# EAGLE board RTC-Module-Panel_v10 (EAGLE 7.7.0), part 1 of 7
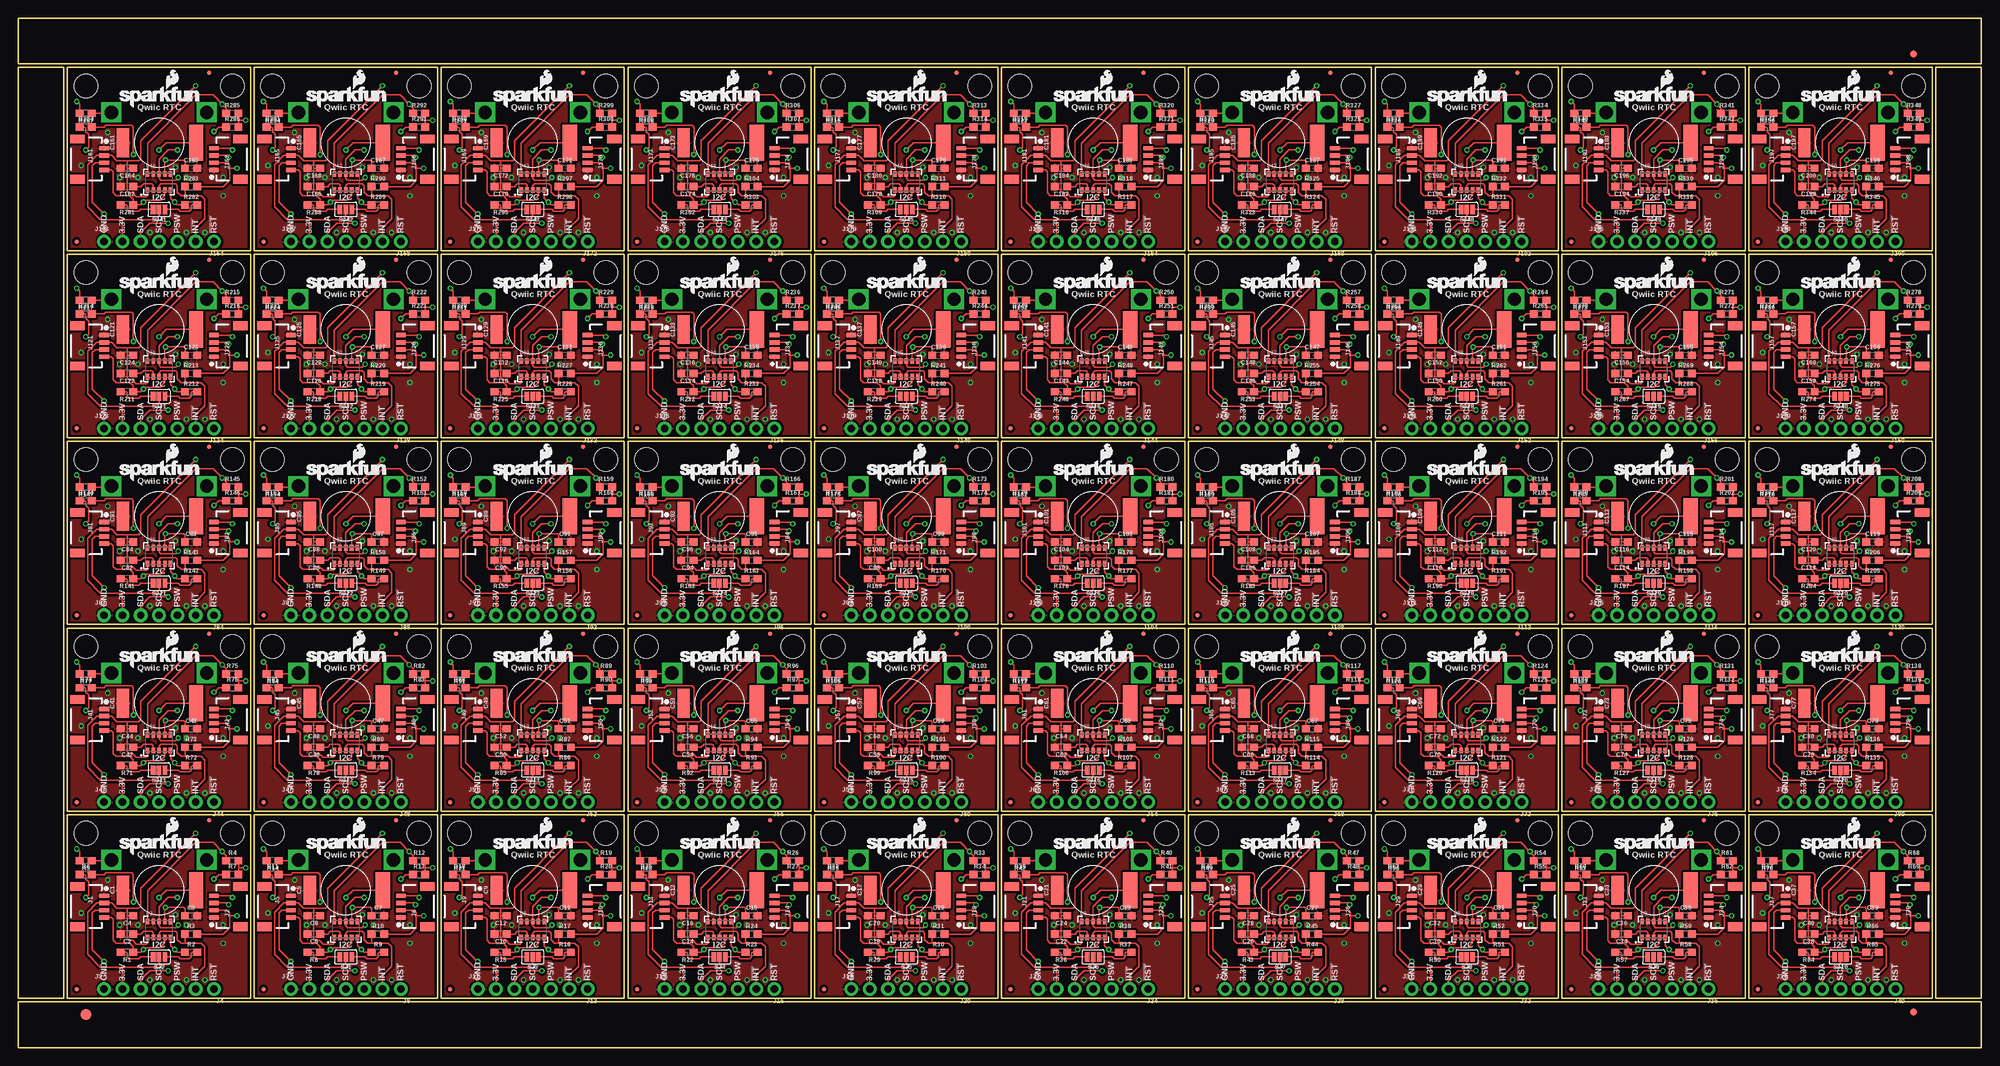
[diagram p0: board, top side]
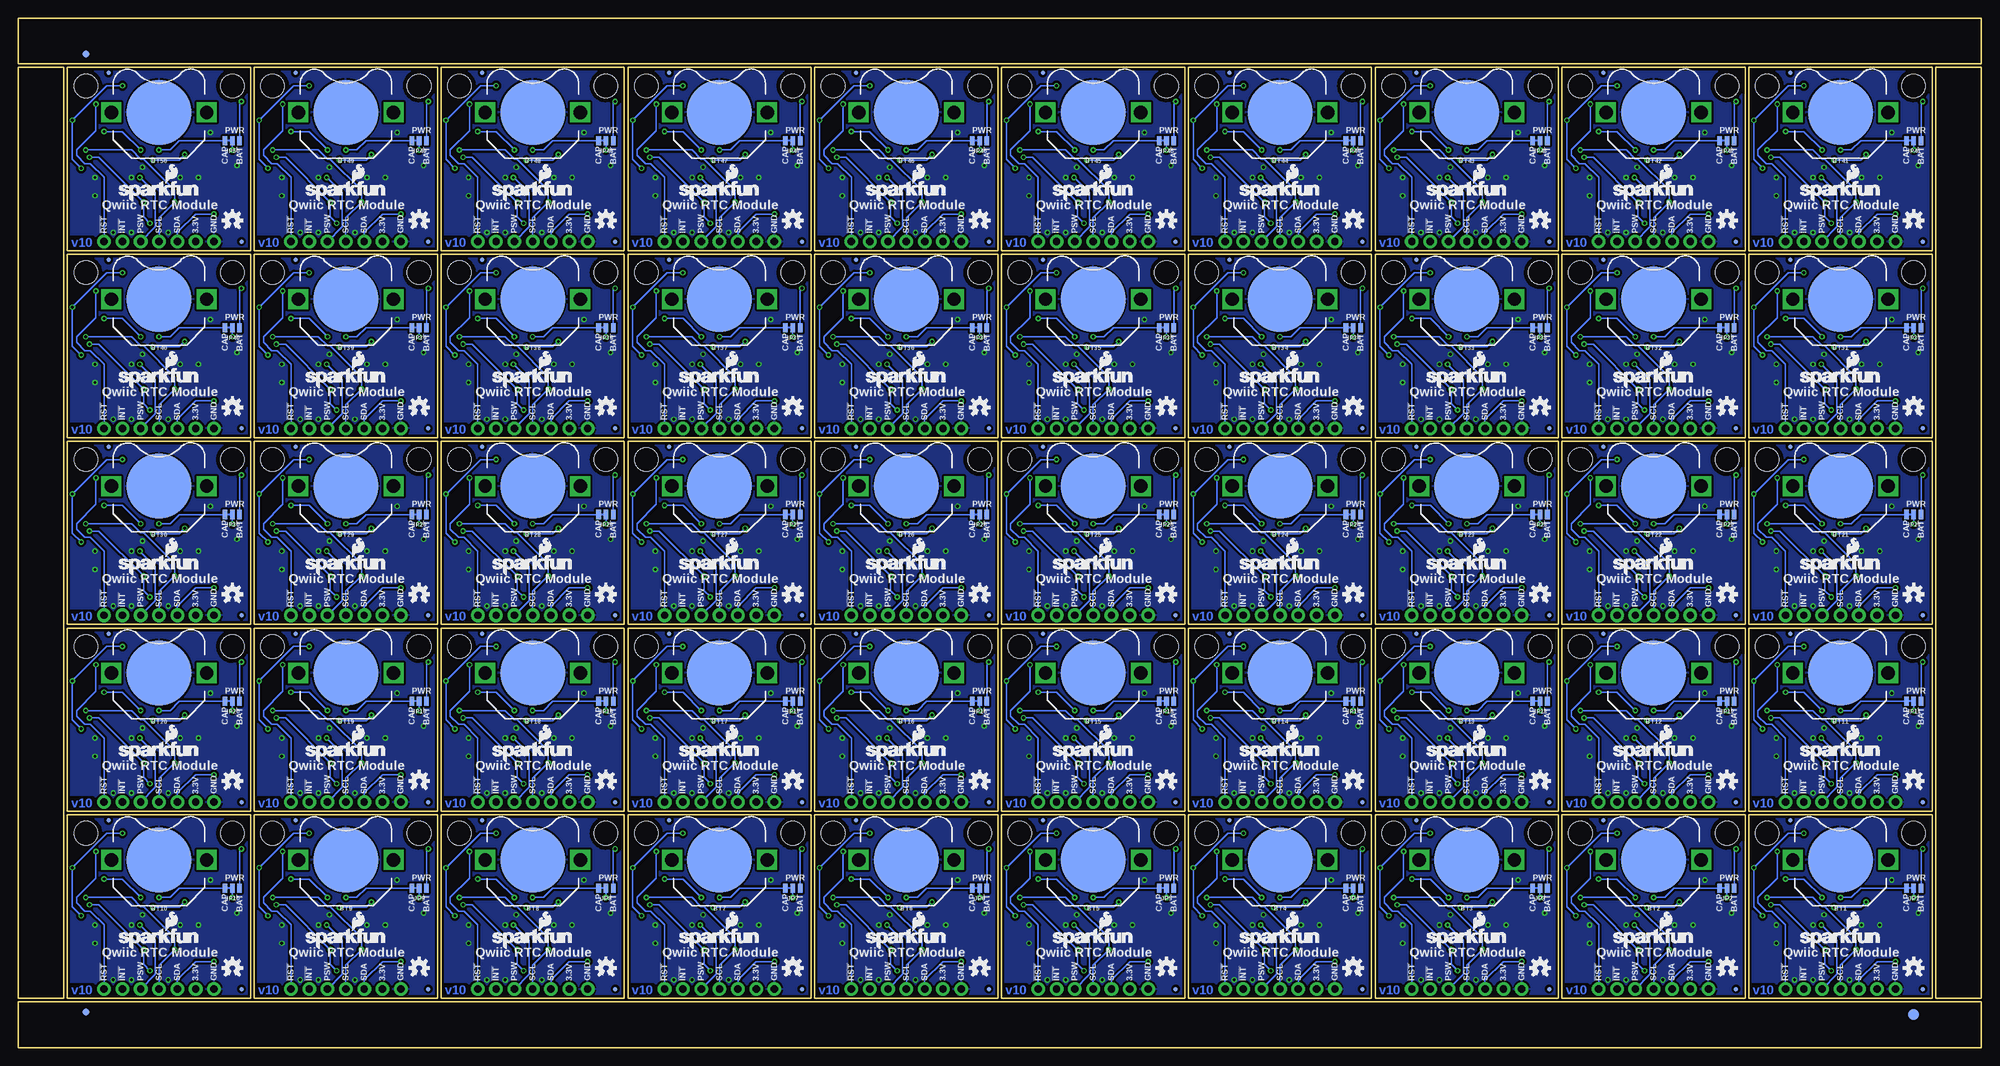
[diagram p1: board, bottom side, seen from below]

Size 272.29 x 142.75 mm. Coordinates in mm from the lower left corner, seen from the top.
Outline: 224 segments
Copper layers (1*16): Top 0.035mm / dielectric 1.5mm / Bottom 0.035mm
Design rules "SparkFun-2-layer-TIGHT": minimum track width 7mil, minimum drill 15mil, track to track 7mil, track to pad 7mil, pad to pad 7mil, via to via 7mil, smd to smd 7mil, copper to edge 7mil, drill to drill 7mil, minimum pad ring 7mil, minimum via ring 7mil, stop-mask expansion 4mil, vias tented up to drill 25mil, thermal gap 10mil

## Footprints (pad centres in the part's own frame; a part is rotated, then mirrored left to right if it is on the bottom)
BATTCON_12MM_PTH = smd 9 x 9: GND 0,0 | drill 1.854 square: VCC@1 6.604,0; VCC@2 -6.604,0
DSK-RADIAL-6.8MM = smd 5 x 2: + 0,5.15 | smd 4 x 1.7: - 0,-5
0603 = smd 1.1 x 1: 1 -0.85,0; 2 0.85,0
FIDUCIAL-1.5X3 = smd 1.5 x 1.5: 1 0,0
FIDUCIAL-1X2 = smd 1 x 1: 1 0,0
FIDUCIAL-MICRO = smd 0.635 x 0.635: 1 0,0
1X04_1MM_RA = smd 0.6 x 1.35: 1 -1.5,0; 2 -0.5,0; 3 0.5,0; 4 1.5,0 | smd 1.2 x 2: NC1 2.8,-3.675; NC2 -2.8,-3.675
1X04_NO_SILK = drill 1.016 pad 1.88: 1 0,0; 2 2.54,0; 3 5.08,0; 4 7.62,0
1X03_NO_SILK = drill 1.016 pad 1.88: 1 0,0; 2 2.54,0; 3 5.08,0
SMT-JUMPER_3_1-NC_TRACE_NO-SILK = smd 0.635 x 1.27: 1 -1.016,0; 2 0,0; 3 1.016,0
SMT-JUMPER_3_2-NC_PASTE_SILK = smd 0.635 x 1.27: 1 -0.813,0; 2 0,0; 3 0.813,0
RV-1805 = smd 0.5 x 0.8: 1 -1.6,-1.1; 2 -0.8,-1.1; 3 0,-1.1; 4 0.8,-1.1; 5 1.6,-1.1; 6 1.6,1.1; 7 0.8,1.1; 8 0,1.1; 9 -0.8,1.1; 10 -1.6,1.1 | smd 0 x 0: 11 0,0
STAND-OFF = hole 3.302: 0,0

## Placement (x,y rotation side)
BT1  [BATTCON_12MM_PTH]  19.56,26.04 0 bottom
BT2  [BATTCON_12MM_PTH]  45.47,26.04 0 bottom
BT3  [BATTCON_12MM_PTH]  71.37,26.04 0 bottom
BT4  [BATTCON_12MM_PTH]  97.28,26.04 0 bottom
BT5  [BATTCON_12MM_PTH]  123.19,26.04 0 bottom
BT6  [BATTCON_12MM_PTH]  149.1,26.04 0 bottom
BT7  [BATTCON_12MM_PTH]  175.01,26.04 0 bottom
BT8  [BATTCON_12MM_PTH]  200.91,26.04 0 bottom
BT9  [BATTCON_12MM_PTH]  226.82,26.04 0 bottom
BT10  [BATTCON_12MM_PTH]  252.73,26.04 0 bottom
BT11  [BATTCON_12MM_PTH]  19.56,51.94 0 bottom
BT12  [BATTCON_12MM_PTH]  45.47,51.94 0 bottom
BT13  [BATTCON_12MM_PTH]  71.37,51.94 0 bottom
BT14  [BATTCON_12MM_PTH]  97.28,51.94 0 bottom
BT15  [BATTCON_12MM_PTH]  123.19,51.94 0 bottom
BT16  [BATTCON_12MM_PTH]  149.1,51.94 0 bottom
BT17  [BATTCON_12MM_PTH]  175.01,51.94 0 bottom
BT18  [BATTCON_12MM_PTH]  200.91,51.94 0 bottom
BT19  [BATTCON_12MM_PTH]  226.82,51.94 0 bottom
BT20  [BATTCON_12MM_PTH]  252.73,51.94 0 bottom
BT21  [BATTCON_12MM_PTH]  19.56,77.85 0 bottom
BT22  [BATTCON_12MM_PTH]  45.47,77.85 0 bottom
BT23  [BATTCON_12MM_PTH]  71.37,77.85 0 bottom
BT24  [BATTCON_12MM_PTH]  97.28,77.85 0 bottom
BT25  [BATTCON_12MM_PTH]  123.19,77.85 0 bottom
BT26  [BATTCON_12MM_PTH]  149.1,77.85 0 bottom
BT27  [BATTCON_12MM_PTH]  175.01,77.85 0 bottom
BT28  [BATTCON_12MM_PTH]  200.91,77.85 0 bottom
BT29  [BATTCON_12MM_PTH]  226.82,77.85 0 bottom
BT30  [BATTCON_12MM_PTH]  252.73,77.85 0 bottom
BT31  [BATTCON_12MM_PTH]  19.56,103.76 0 bottom
BT32  [BATTCON_12MM_PTH]  45.47,103.76 0 bottom
BT33  [BATTCON_12MM_PTH]  71.37,103.76 0 bottom
BT34  [BATTCON_12MM_PTH]  97.28,103.76 0 bottom
BT35  [BATTCON_12MM_PTH]  123.19,103.76 0 bottom
BT36  [BATTCON_12MM_PTH]  149.1,103.76 0 bottom
BT37  [BATTCON_12MM_PTH]  175.01,103.76 0 bottom
BT38  [BATTCON_12MM_PTH]  200.91,103.76 0 bottom
BT39  [BATTCON_12MM_PTH]  226.82,103.76 0 bottom
BT40  [BATTCON_12MM_PTH]  252.73,103.76 0 bottom
BT41  [BATTCON_12MM_PTH]  19.56,129.67 0 bottom
BT42  [BATTCON_12MM_PTH]  45.47,129.67 0 bottom
BT43  [BATTCON_12MM_PTH]  71.37,129.67 0 bottom
BT44  [BATTCON_12MM_PTH]  97.28,129.67 0 bottom
BT45  [BATTCON_12MM_PTH]  123.19,129.67 0 bottom
BT46  [BATTCON_12MM_PTH]  149.1,129.67 0 bottom
BT47  [BATTCON_12MM_PTH]  175.01,129.67 0 bottom
BT48  [BATTCON_12MM_PTH]  200.91,129.67 0 bottom
BT49  [BATTCON_12MM_PTH]  226.82,129.67 0 bottom
BT50  [BATTCON_12MM_PTH]  252.73,129.67 0 bottom
C1  .22F-SUPERCAP  [DSK-RADIAL-6.8MM]  19.56,21.84 270 top
C2  47pF  [0603]  15.11,15.75 180 top
C3  10nF  [0603]  24,18.29 0 top
C4  10nF  [0603]  15.11,18.29 180 top
C5  .22F-SUPERCAP  [DSK-RADIAL-6.8MM]  45.47,21.84 270 top
C6  47pF  [0603]  41.02,15.75 180 top
C7  10nF  [0603]  49.91,18.29 0 top
C8  10nF  [0603]  41.02,18.29 180 top
C9  .22F-SUPERCAP  [DSK-RADIAL-6.8MM]  71.37,21.84 270 top
C10  47pF  [0603]  66.93,15.75 180 top
C11  10nF  [0603]  75.82,18.29 0 top
C12  10nF  [0603]  66.93,18.29 180 top
C13  .22F-SUPERCAP  [DSK-RADIAL-6.8MM]  97.28,21.84 270 top
C14  47pF  [0603]  92.84,15.75 180 top
C15  10nF  [0603]  101.73,18.29 0 top
C16  10nF  [0603]  92.84,18.29 180 top
C17  .22F-SUPERCAP  [DSK-RADIAL-6.8MM]  123.19,21.84 270 top
C18  47pF  [0603]  118.75,15.75 180 top
C19  10nF  [0603]  127.64,18.29 0 top
C20  10nF  [0603]  118.75,18.29 180 top
C21  .22F-SUPERCAP  [DSK-RADIAL-6.8MM]  149.1,21.84 270 top
C22  47pF  [0603]  144.65,15.75 180 top
C23  10nF  [0603]  153.54,18.29 0 top
C24  10nF  [0603]  144.65,18.29 180 top
C25  .22F-SUPERCAP  [DSK-RADIAL-6.8MM]  175.01,21.84 270 top
C26  47pF  [0603]  170.56,15.75 180 top
C27  10nF  [0603]  179.45,18.29 0 top
C28  10nF  [0603]  170.56,18.29 180 top
C29  .22F-SUPERCAP  [DSK-RADIAL-6.8MM]  200.91,21.84 270 top
C30  47pF  [0603]  196.47,15.75 180 top
C31  10nF  [0603]  205.36,18.29 0 top
C32  10nF  [0603]  196.47,18.29 180 top
C33  .22F-SUPERCAP  [DSK-RADIAL-6.8MM]  226.82,21.84 270 top
C34  47pF  [0603]  222.38,15.75 180 top
C35  10nF  [0603]  231.27,18.29 0 top
C36  10nF  [0603]  222.38,18.29 180 top
C37  .22F-SUPERCAP  [DSK-RADIAL-6.8MM]  252.73,21.84 270 top
C38  47pF  [0603]  248.28,15.75 180 top
C39  10nF  [0603]  257.18,18.29 0 top
C40  10nF  [0603]  248.28,18.29 180 top
C41  .22F-SUPERCAP  [DSK-RADIAL-6.8MM]  19.56,47.75 270 top
C42  47pF  [0603]  15.11,41.66 180 top
C43  10nF  [0603]  24,44.2 0 top
C44  10nF  [0603]  15.11,44.2 180 top
C45  .22F-SUPERCAP  [DSK-RADIAL-6.8MM]  45.47,47.75 270 top
C46  47pF  [0603]  41.02,41.66 180 top
C47  10nF  [0603]  49.91,44.2 0 top
C48  10nF  [0603]  41.02,44.2 180 top
C49  .22F-SUPERCAP  [DSK-RADIAL-6.8MM]  71.37,47.75 270 top
C50  47pF  [0603]  66.93,41.66 180 top
C51  10nF  [0603]  75.82,44.2 0 top
C52  10nF  [0603]  66.93,44.2 180 top
C53  .22F-SUPERCAP  [DSK-RADIAL-6.8MM]  97.28,47.75 270 top
C54  47pF  [0603]  92.84,41.66 180 top
C55  10nF  [0603]  101.73,44.2 0 top
C56  10nF  [0603]  92.84,44.2 180 top
C57  .22F-SUPERCAP  [DSK-RADIAL-6.8MM]  123.19,47.75 270 top
C58  47pF  [0603]  118.75,41.66 180 top
C59  10nF  [0603]  127.64,44.2 0 top
C60  10nF  [0603]  118.75,44.2 180 top
C61  .22F-SUPERCAP  [DSK-RADIAL-6.8MM]  149.1,47.75 270 top
C62  47pF  [0603]  144.65,41.66 180 top
C63  10nF  [0603]  153.54,44.2 0 top
C64  10nF  [0603]  144.65,44.2 180 top
C65  .22F-SUPERCAP  [DSK-RADIAL-6.8MM]  175.01,47.75 270 top
C66  47pF  [0603]  170.56,41.66 180 top
C67  10nF  [0603]  179.45,44.2 0 top
C68  10nF  [0603]  170.56,44.2 180 top
C69  .22F-SUPERCAP  [DSK-RADIAL-6.8MM]  200.91,47.75 270 top
C70  47pF  [0603]  196.47,41.66 180 top
C71  10nF  [0603]  205.36,44.2 0 top
C72  10nF  [0603]  196.47,44.2 180 top
C73  .22F-SUPERCAP  [DSK-RADIAL-6.8MM]  226.82,47.75 270 top
C74  47pF  [0603]  222.38,41.66 180 top
C75  10nF  [0603]  231.27,44.2 0 top
C76  10nF  [0603]  222.38,44.2 180 top
C77  .22F-SUPERCAP  [DSK-RADIAL-6.8MM]  252.73,47.75 270 top
C78  47pF  [0603]  248.28,41.66 180 top
C79  10nF  [0603]  257.18,44.2 0 top
C80  10nF  [0603]  248.28,44.2 180 top
C81  .22F-SUPERCAP  [DSK-RADIAL-6.8MM]  19.56,73.66 270 top
C82  47pF  [0603]  15.11,67.56 180 top
C83  10nF  [0603]  24,70.1 0 top
C84  10nF  [0603]  15.11,70.1 180 top
C85  .22F-SUPERCAP  [DSK-RADIAL-6.8MM]  45.47,73.66 270 top
C86  47pF  [0603]  41.02,67.56 180 top
C87  10nF  [0603]  49.91,70.1 0 top
C88  10nF  [0603]  41.02,70.1 180 top
C89  .22F-SUPERCAP  [DSK-RADIAL-6.8MM]  71.37,73.66 270 top
C90  47pF  [0603]  66.93,67.56 180 top
C91  10nF  [0603]  75.82,70.1 0 top
C92  10nF  [0603]  66.93,70.1 180 top
C93  .22F-SUPERCAP  [DSK-RADIAL-6.8MM]  97.28,73.66 270 top
C94  47pF  [0603]  92.84,67.56 180 top
C95  10nF  [0603]  101.73,70.1 0 top
C96  10nF  [0603]  92.84,70.1 180 top
C97  .22F-SUPERCAP  [DSK-RADIAL-6.8MM]  123.19,73.66 270 top
C98  47pF  [0603]  118.75,67.56 180 top
C99  10nF  [0603]  127.64,70.1 0 top
C100  10nF  [0603]  118.75,70.1 180 top
C101  .22F-SUPERCAP  [DSK-RADIAL-6.8MM]  149.1,73.66 270 top
C102  47pF  [0603]  144.65,67.56 180 top
C103  10nF  [0603]  153.54,70.1 0 top
C104  10nF  [0603]  144.65,70.1 180 top
C105  .22F-SUPERCAP  [DSK-RADIAL-6.8MM]  175.01,73.66 270 top
C106  47pF  [0603]  170.56,67.56 180 top
C107  10nF  [0603]  179.45,70.1 0 top
C108  10nF  [0603]  170.56,70.1 180 top
C109  .22F-SUPERCAP  [DSK-RADIAL-6.8MM]  200.91,73.66 270 top
C110  47pF  [0603]  196.47,67.56 180 top
C111  10nF  [0603]  205.36,70.1 0 top
C112  10nF  [0603]  196.47,70.1 180 top
C113  .22F-SUPERCAP  [DSK-RADIAL-6.8MM]  226.82,73.66 270 top
C114  47pF  [0603]  222.38,67.56 180 top
C115  10nF  [0603]  231.27,70.1 0 top
C116  10nF  [0603]  222.38,70.1 180 top
C117  .22F-SUPERCAP  [DSK-RADIAL-6.8MM]  252.73,73.66 270 top
C118  47pF  [0603]  248.28,67.56 180 top
C119  10nF  [0603]  257.18,70.1 0 top
C120  10nF  [0603]  248.28,70.1 180 top
C121  .22F-SUPERCAP  [DSK-RADIAL-6.8MM]  19.56,99.57 270 top
C122  47pF  [0603]  15.11,93.47 180 top
C123  10nF  [0603]  24,96.01 0 top
C124  10nF  [0603]  15.11,96.01 180 top
C125  .22F-SUPERCAP  [DSK-RADIAL-6.8MM]  45.47,99.57 270 top
C126  47pF  [0603]  41.02,93.47 180 top
C127  10nF  [0603]  49.91,96.01 0 top
C128  10nF  [0603]  41.02,96.01 180 top
C129  .22F-SUPERCAP  [DSK-RADIAL-6.8MM]  71.37,99.57 270 top
C130  47pF  [0603]  66.93,93.47 180 top
C131  10nF  [0603]  75.82,96.01 0 top
C132  10nF  [0603]  66.93,96.01 180 top
C133  .22F-SUPERCAP  [DSK-RADIAL-6.8MM]  97.28,99.57 270 top
C134  47pF  [0603]  92.84,93.47 180 top
C135  10nF  [0603]  101.73,96.01 0 top
C136  10nF  [0603]  92.84,96.01 180 top
C137  .22F-SUPERCAP  [DSK-RADIAL-6.8MM]  123.19,99.57 270 top
C138  47pF  [0603]  118.75,93.47 180 top
C139  10nF  [0603]  127.64,96.01 0 top
C140  10nF  [0603]  118.75,96.01 180 top
C141  .22F-SUPERCAP  [DSK-RADIAL-6.8MM]  149.1,99.57 270 top
C142  47pF  [0603]  144.65,93.47 180 top
C143  10nF  [0603]  153.54,96.01 0 top
C144  10nF  [0603]  144.65,96.01 180 top
C145  .22F-SUPERCAP  [DSK-RADIAL-6.8MM]  175.01,99.57 270 top
C146  47pF  [0603]  170.56,93.47 180 top
C147  10nF  [0603]  179.45,96.01 0 top
C148  10nF  [0603]  170.56,96.01 180 top
C149  .22F-SUPERCAP  [DSK-RADIAL-6.8MM]  200.91,99.57 270 top
C150  47pF  [0603]  196.47,93.47 180 top
C151  10nF  [0603]  205.36,96.01 0 top
C152  10nF  [0603]  196.47,96.01 180 top
C153  .22F-SUPERCAP  [DSK-RADIAL-6.8MM]  226.82,99.57 270 top
C154  47pF  [0603]  222.38,93.47 180 top
C155  10nF  [0603]  231.27,96.01 0 top
C156  10nF  [0603]  222.38,96.01 180 top
C157  .22F-SUPERCAP  [DSK-RADIAL-6.8MM]  252.73,99.57 270 top
C158  47pF  [0603]  248.28,93.47 180 top
C159  10nF  [0603]  257.18,96.01 0 top
C160  10nF  [0603]  248.28,96.01 180 top
C161  .22F-SUPERCAP  [DSK-RADIAL-6.8MM]  19.56,125.48 270 top
C162  47pF  [0603]  15.11,119.38 180 top
C163  10nF  [0603]  24,121.92 0 top
C164  10nF  [0603]  15.11,121.92 180 top
C165  .22F-SUPERCAP  [DSK-RADIAL-6.8MM]  45.47,125.48 270 top
C166  47pF  [0603]  41.02,119.38 180 top
C167  10nF  [0603]  49.91,121.92 0 top
C168  10nF  [0603]  41.02,121.92 180 top
C169  .22F-SUPERCAP  [DSK-RADIAL-6.8MM]  71.37,125.48 270 top
C170  47pF  [0603]  66.93,119.38 180 top
C171  10nF  [0603]  75.82,121.92 0 top
C172  10nF  [0603]  66.93,121.92 180 top
C173  .22F-SUPERCAP  [DSK-RADIAL-6.8MM]  97.28,125.48 270 top
C174  47pF  [0603]  92.84,119.38 180 top
C175  10nF  [0603]  101.73,121.92 0 top
C176  10nF  [0603]  92.84,121.92 180 top
C177  .22F-SUPERCAP  [DSK-RADIAL-6.8MM]  123.19,125.48 270 top
C178  47pF  [0603]  118.75,119.38 180 top
C179  10nF  [0603]  127.64,121.92 0 top
C180  10nF  [0603]  118.75,121.92 180 top
C181  .22F-SUPERCAP  [DSK-RADIAL-6.8MM]  149.1,125.48 270 top
C182  47pF  [0603]  144.65,119.38 180 top
C183  10nF  [0603]  153.54,121.92 0 top
C184  10nF  [0603]  144.65,121.92 180 top
C185  .22F-SUPERCAP  [DSK-RADIAL-6.8MM]  175.01,125.48 270 top
C186  47pF  [0603]  170.56,119.38 180 top
C187  10nF  [0603]  179.45,121.92 0 top
C188  10nF  [0603]  170.56,121.92 180 top
C189  .22F-SUPERCAP  [DSK-RADIAL-6.8MM]  200.91,125.48 270 top
C190  47pF  [0603]  196.47,119.38 180 top
C191  10nF  [0603]  205.36,121.92 0 top
C192  10nF  [0603]  196.47,121.92 180 top
C193  .22F-SUPERCAP  [DSK-RADIAL-6.8MM]  226.82,125.48 270 top
C194  47pF  [0603]  222.38,119.38 180 top
C195  10nF  [0603]  231.27,121.92 0 top
C196  10nF  [0603]  222.38,121.92 180 top
C197  .22F-SUPERCAP  [DSK-RADIAL-6.8MM]  252.73,125.48 270 top
C198  47pF  [0603]  248.28,119.38 180 top
C199  10nF  [0603]  257.18,121.92 0 top
C200  10nF  [0603]  248.28,121.92 180 top
E$1  [FIDUCIAL-1.5X3]  9.4,4.57 0 top
E$2  [FIDUCIAL-1.5X3]  9.4,4.57 0 bottom
E$3  [FIDUCIAL-1X2]  262.89,4.95 90 bottom
E$4  [FIDUCIAL-1X2]  262.89,137.79 90 bottom
E$6  [FIDUCIAL-1X2]  262.89,4.95 90 top
E$7  [FIDUCIAL-1X2]  262.89,137.79 90 top
FD1  FIDUCIALUFIDUCIAL  [FIDUCIAL-MICRO]  26.54,31.5 0 bottom
FD2  FIDUCIALUFIDUCIAL  [FIDUCIAL-MICRO]  26.54,31.5 0 top
FD3  FIDUCIALUFIDUCIAL  [FIDUCIAL-MICRO]  8.13,8.13 0 bottom
FD4  FIDUCIALUFIDUCIAL  [FIDUCIAL-MICRO]  8.13,8.13 0 top
FD5  FIDUCIALUFIDUCIAL  [FIDUCIAL-MICRO]  52.45,31.5 0 bottom
FD6  FIDUCIALUFIDUCIAL  [FIDUCIAL-MICRO]  52.45,31.5 0 top
FD7  FIDUCIALUFIDUCIAL  [FIDUCIAL-MICRO]  34.04,8.13 0 bottom
FD8  FIDUCIALUFIDUCIAL  [FIDUCIAL-MICRO]  34.04,8.13 0 top
FD9  FIDUCIALUFIDUCIAL  [FIDUCIAL-MICRO]  78.36,31.5 0 bottom
FD10  FIDUCIALUFIDUCIAL  [FIDUCIAL-MICRO]  78.36,31.5 0 top
FD11  FIDUCIALUFIDUCIAL  [FIDUCIAL-MICRO]  59.94,8.13 0 bottom
FD12  FIDUCIALUFIDUCIAL  [FIDUCIAL-MICRO]  59.94,8.13 0 top
FD13  FIDUCIALUFIDUCIAL  [FIDUCIAL-MICRO]  104.27,31.5 0 bottom
FD14  FIDUCIALUFIDUCIAL  [FIDUCIAL-MICRO]  104.27,31.5 0 top
FD15  FIDUCIALUFIDUCIAL  [FIDUCIAL-MICRO]  85.85,8.13 0 bottom
FD16  FIDUCIALUFIDUCIAL  [FIDUCIAL-MICRO]  85.85,8.13 0 top
FD17  FIDUCIALUFIDUCIAL  [FIDUCIAL-MICRO]  130.18,31.5 0 bottom
FD18  FIDUCIALUFIDUCIAL  [FIDUCIAL-MICRO]  130.18,31.5 0 top
FD19  FIDUCIALUFIDUCIAL  [FIDUCIAL-MICRO]  111.76,8.13 0 bottom
FD20  FIDUCIALUFIDUCIAL  [FIDUCIAL-MICRO]  111.76,8.13 0 top
FD21  FIDUCIALUFIDUCIAL  [FIDUCIAL-MICRO]  156.08,31.5 0 bottom
FD22  FIDUCIALUFIDUCIAL  [FIDUCIAL-MICRO]  156.08,31.5 0 top
FD23  FIDUCIALUFIDUCIAL  [FIDUCIAL-MICRO]  137.67,8.13 0 bottom
FD24  FIDUCIALUFIDUCIAL  [FIDUCIAL-MICRO]  137.67,8.13 0 top
FD25  FIDUCIALUFIDUCIAL  [FIDUCIAL-MICRO]  181.99,31.5 0 bottom
FD26  FIDUCIALUFIDUCIAL  [FIDUCIAL-MICRO]  181.99,31.5 0 top
FD27  FIDUCIALUFIDUCIAL  [FIDUCIAL-MICRO]  163.58,8.13 0 bottom
FD28  FIDUCIALUFIDUCIAL  [FIDUCIAL-MICRO]  163.58,8.13 0 top
FD29  FIDUCIALUFIDUCIAL  [FIDUCIAL-MICRO]  207.9,31.5 0 bottom
FD30  FIDUCIALUFIDUCIAL  [FIDUCIAL-MICRO]  207.9,31.5 0 top
FD31  FIDUCIALUFIDUCIAL  [FIDUCIAL-MICRO]  189.48,8.13 0 bottom
FD32  FIDUCIALUFIDUCIAL  [FIDUCIAL-MICRO]  189.48,8.13 0 top
FD33  FIDUCIALUFIDUCIAL  [FIDUCIAL-MICRO]  233.81,31.5 0 bottom
FD34  FIDUCIALUFIDUCIAL  [FIDUCIAL-MICRO]  233.81,31.5 0 top
FD35  FIDUCIALUFIDUCIAL  [FIDUCIAL-MICRO]  215.39,8.13 0 bottom
FD36  FIDUCIALUFIDUCIAL  [FIDUCIAL-MICRO]  215.39,8.13 0 top
FD37  FIDUCIALUFIDUCIAL  [FIDUCIAL-MICRO]  259.71,31.5 0 bottom
FD38  FIDUCIALUFIDUCIAL  [FIDUCIAL-MICRO]  259.71,31.5 0 top
FD39  FIDUCIALUFIDUCIAL  [FIDUCIAL-MICRO]  241.3,8.13 0 bottom
FD40  FIDUCIALUFIDUCIAL  [FIDUCIAL-MICRO]  241.3,8.13 0 top
FD41  FIDUCIALUFIDUCIAL  [FIDUCIAL-MICRO]  26.54,57.4 0 bottom
FD42  FIDUCIALUFIDUCIAL  [FIDUCIAL-MICRO]  26.54,57.4 0 top
FD43  FIDUCIALUFIDUCIAL  [FIDUCIAL-MICRO]  8.13,34.04 0 bottom
FD44  FIDUCIALUFIDUCIAL  [FIDUCIAL-MICRO]  8.13,34.04 0 top
FD45  FIDUCIALUFIDUCIAL  [FIDUCIAL-MICRO]  52.45,57.4 0 bottom
FD46  FIDUCIALUFIDUCIAL  [FIDUCIAL-MICRO]  52.45,57.4 0 top
FD47  FIDUCIALUFIDUCIAL  [FIDUCIAL-MICRO]  34.04,34.04 0 bottom
FD48  FIDUCIALUFIDUCIAL  [FIDUCIAL-MICRO]  34.04,34.04 0 top
FD49  FIDUCIALUFIDUCIAL  [FIDUCIAL-MICRO]  78.36,57.4 0 bottom
FD50  FIDUCIALUFIDUCIAL  [FIDUCIAL-MICRO]  78.36,57.4 0 top
FD51  FIDUCIALUFIDUCIAL  [FIDUCIAL-MICRO]  59.94,34.04 0 bottom
FD52  FIDUCIALUFIDUCIAL  [FIDUCIAL-MICRO]  59.94,34.04 0 top
FD53  FIDUCIALUFIDUCIAL  [FIDUCIAL-MICRO]  104.27,57.4 0 bottom
FD54  FIDUCIALUFIDUCIAL  [FIDUCIAL-MICRO]  104.27,57.4 0 top
FD55  FIDUCIALUFIDUCIAL  [FIDUCIAL-MICRO]  85.85,34.04 0 bottom
FD56  FIDUCIALUFIDUCIAL  [FIDUCIAL-MICRO]  85.85,34.04 0 top
FD57  FIDUCIALUFIDUCIAL  [FIDUCIAL-MICRO]  130.18,57.4 0 bottom
FD58  FIDUCIALUFIDUCIAL  [FIDUCIAL-MICRO]  130.18,57.4 0 top
FD59  FIDUCIALUFIDUCIAL  [FIDUCIAL-MICRO]  111.76,34.04 0 bottom
FD60  FIDUCIALUFIDUCIAL  [FIDUCIAL-MICRO]  111.76,34.04 0 top
FD61  FIDUCIALUFIDUCIAL  [FIDUCIAL-MICRO]  156.08,57.4 0 bottom
FD62  FIDUCIALUFIDUCIAL  [FIDUCIAL-MICRO]  156.08,57.4 0 top
FD63  FIDUCIALUFIDUCIAL  [FIDUCIAL-MICRO]  137.67,34.04 0 bottom
FD64  FIDUCIALUFIDUCIAL  [FIDUCIAL-MICRO]  137.67,34.04 0 top
FD65  FIDUCIALUFIDUCIAL  [FIDUCIAL-MICRO]  181.99,57.4 0 bottom
FD66  FIDUCIALUFIDUCIAL  [FIDUCIAL-MICRO]  181.99,57.4 0 top
FD67  FIDUCIALUFIDUCIAL  [FIDUCIAL-MICRO]  163.58,34.04 0 bottom
FD68  FIDUCIALUFIDUCIAL  [FIDUCIAL-MICRO]  163.58,34.04 0 top
FD69  FIDUCIALUFIDUCIAL  [FIDUCIAL-MICRO]  207.9,57.4 0 bottom
FD70  FIDUCIALUFIDUCIAL  [FIDUCIAL-MICRO]  207.9,57.4 0 top
FD71  FIDUCIALUFIDUCIAL  [FIDUCIAL-MICRO]  189.48,34.04 0 bottom
FD72  FIDUCIALUFIDUCIAL  [FIDUCIAL-MICRO]  189.48,34.04 0 top
FD73  FIDUCIALUFIDUCIAL  [FIDUCIAL-MICRO]  233.81,57.4 0 bottom
FD74  FIDUCIALUFIDUCIAL  [FIDUCIAL-MICRO]  233.81,57.4 0 top
FD75  FIDUCIALUFIDUCIAL  [FIDUCIAL-MICRO]  215.39,34.04 0 bottom
FD76  FIDUCIALUFIDUCIAL  [FIDUCIAL-MICRO]  215.39,34.04 0 top
FD77  FIDUCIALUFIDUCIAL  [FIDUCIAL-MICRO]  259.71,57.4 0 bottom
FD78  FIDUCIALUFIDUCIAL  [FIDUCIAL-MICRO]  259.71,57.4 0 top
FD79  FIDUCIALUFIDUCIAL  [FIDUCIAL-MICRO]  241.3,34.04 0 bottom
FD80  FIDUCIALUFIDUCIAL  [FIDUCIAL-MICRO]  241.3,34.04 0 top
FD81  FIDUCIALUFIDUCIAL  [FIDUCIAL-MICRO]  26.54,83.31 0 bottom
FD82  FIDUCIALUFIDUCIAL  [FIDUCIAL-MICRO]  26.54,83.31 0 top
FD83  FIDUCIALUFIDUCIAL  [FIDUCIAL-MICRO]  8.13,59.94 0 bottom
FD84  FIDUCIALUFIDUCIAL  [FIDUCIAL-MICRO]  8.13,59.94 0 top
FD85  FIDUCIALUFIDUCIAL  [FIDUCIAL-MICRO]  52.45,83.31 0 bottom
FD86  FIDUCIALUFIDUCIAL  [FIDUCIAL-MICRO]  52.45,83.31 0 top
FD87  FIDUCIALUFIDUCIAL  [FIDUCIAL-MICRO]  34.04,59.94 0 bottom
FD88  FIDUCIALUFIDUCIAL  [FIDUCIAL-MICRO]  34.04,59.94 0 top
FD89  FIDUCIALUFIDUCIAL  [FIDUCIAL-MICRO]  78.36,83.31 0 bottom
FD90  FIDUCIALUFIDUCIAL  [FIDUCIAL-MICRO]  78.36,83.31 0 top
FD91  FIDUCIALUFIDUCIAL  [FIDUCIAL-MICRO]  59.94,59.94 0 bottom
FD92  FIDUCIALUFIDUCIAL  [FIDUCIAL-MICRO]  59.94,59.94 0 top
FD93  FIDUCIALUFIDUCIAL  [FIDUCIAL-MICRO]  104.27,83.31 0 bottom
FD94  FIDUCIALUFIDUCIAL  [FIDUCIAL-MICRO]  104.27,83.31 0 top
FD95  FIDUCIALUFIDUCIAL  [FIDUCIAL-MICRO]  85.85,59.94 0 bottom
FD96  FIDUCIALUFIDUCIAL  [FIDUCIAL-MICRO]  85.85,59.94 0 top
FD97  FIDUCIALUFIDUCIAL  [FIDUCIAL-MICRO]  130.18,83.31 0 bottom
FD98  FIDUCIALUFIDUCIAL  [FIDUCIAL-MICRO]  130.18,83.31 0 top
FD99  FIDUCIALUFIDUCIAL  [FIDUCIAL-MICRO]  111.76,59.94 0 bottom
FD100  FIDUCIALUFIDUCIAL  [FIDUCIAL-MICRO]  111.76,59.94 0 top
FD101  FIDUCIALUFIDUCIAL  [FIDUCIAL-MICRO]  156.08,83.31 0 bottom
FD102  FIDUCIALUFIDUCIAL  [FIDUCIAL-MICRO]  156.08,83.31 0 top
FD103  FIDUCIALUFIDUCIAL  [FIDUCIAL-MICRO]  137.67,59.94 0 bottom
FD104  FIDUCIALUFIDUCIAL  [FIDUCIAL-MICRO]  137.67,59.94 0 top
FD105  FIDUCIALUFIDUCIAL  [FIDUCIAL-MICRO]  181.99,83.31 0 bottom
FD106  FIDUCIALUFIDUCIAL  [FIDUCIAL-MICRO]  181.99,83.31 0 top
FD107  FIDUCIALUFIDUCIAL  [FIDUCIAL-MICRO]  163.58,59.94 0 bottom
FD108  FIDUCIALUFIDUCIAL  [FIDUCIAL-MICRO]  163.58,59.94 0 top
FD109  FIDUCIALUFIDUCIAL  [FIDUCIAL-MICRO]  207.9,83.31 0 bottom
FD110  FIDUCIALUFIDUCIAL  [FIDUCIAL-MICRO]  207.9,83.31 0 top
FD111  FIDUCIALUFIDUCIAL  [FIDUCIAL-MICRO]  189.48,59.94 0 bottom
FD112  FIDUCIALUFIDUCIAL  [FIDUCIAL-MICRO]  189.48,59.94 0 top
FD113  FIDUCIALUFIDUCIAL  [FIDUCIAL-MICRO]  233.81,83.31 0 bottom
FD114  FIDUCIALUFIDUCIAL  [FIDUCIAL-MICRO]  233.81,83.31 0 top
FD115  FIDUCIALUFIDUCIAL  [FIDUCIAL-MICRO]  215.39,59.94 0 bottom
FD116  FIDUCIALUFIDUCIAL  [FIDUCIAL-MICRO]  215.39,59.94 0 top
FD117  FIDUCIALUFIDUCIAL  [FIDUCIAL-MICRO]  259.71,83.31 0 bottom
FD118  FIDUCIALUFIDUCIAL  [FIDUCIAL-MICRO]  259.71,83.31 0 top
FD119  FIDUCIALUFIDUCIAL  [FIDUCIAL-MICRO]  241.3,59.94 0 bottom
FD120  FIDUCIALUFIDUCIAL  [FIDUCIAL-MICRO]  241.3,59.94 0 top
FD121  FIDUCIALUFIDUCIAL  [FIDUCIAL-MICRO]  26.54,109.22 0 bottom
FD122  FIDUCIALUFIDUCIAL  [FIDUCIAL-MICRO]  26.54,109.22 0 top
FD123  FIDUCIALUFIDUCIAL  [FIDUCIAL-MICRO]  8.13,85.85 0 bottom
FD124  FIDUCIALUFIDUCIAL  [FIDUCIAL-MICRO]  8.13,85.85 0 top
FD125  FIDUCIALUFIDUCIAL  [FIDUCIAL-MICRO]  52.45,109.22 0 bottom
FD126  FIDUCIALUFIDUCIAL  [FIDUCIAL-MICRO]  52.45,109.22 0 top
FD127  FIDUCIALUFIDUCIAL  [FIDUCIAL-MICRO]  34.04,85.85 0 bottom
FD128  FIDUCIALUFIDUCIAL  [FIDUCIAL-MICRO]  34.04,85.85 0 top
FD129  FIDUCIALUFIDUCIAL  [FIDUCIAL-MICRO]  78.36,109.22 0 bottom
FD130  FIDUCIALUFIDUCIAL  [FIDUCIAL-MICRO]  78.36,109.22 0 top
FD131  FIDUCIALUFIDUCIAL  [FIDUCIAL-MICRO]  59.94,85.85 0 bottom
FD132  FIDUCIALUFIDUCIAL  [FIDUCIAL-MICRO]  59.94,85.85 0 top
FD133  FIDUCIALUFIDUCIAL  [FIDUCIAL-MICRO]  104.27,109.22 0 bottom
FD134  FIDUCIALUFIDUCIAL  [FIDUCIAL-MICRO]  104.27,109.22 0 top
FD135  FIDUCIALUFIDUCIAL  [FIDUCIAL-MICRO]  85.85,85.85 0 bottom
FD136  FIDUCIALUFIDUCIAL  [FIDUCIAL-MICRO]  85.85,85.85 0 top
FD137  FIDUCIALUFIDUCIAL  [FIDUCIAL-MICRO]  130.18,109.22 0 bottom
FD138  FIDUCIALUFIDUCIAL  [FIDUCIAL-MICRO]  130.18,109.22 0 top
FD139  FIDUCIALUFIDUCIAL  [FIDUCIAL-MICRO]  111.76,85.85 0 bottom
FD140  FIDUCIALUFIDUCIAL  [FIDUCIAL-MICRO]  111.76,85.85 0 top
FD141  FIDUCIALUFIDUCIAL  [FIDUCIAL-MICRO]  156.08,109.22 0 bottom
FD142  FIDUCIALUFIDUCIAL  [FIDUCIAL-MICRO]  156.08,109.22 0 top
FD143  FIDUCIALUFIDUCIAL  [FIDUCIAL-MICRO]  137.67,85.85 0 bottom
FD144  FIDUCIALUFIDUCIAL  [FIDUCIAL-MICRO]  137.67,85.85 0 top
FD145  FIDUCIALUFIDUCIAL  [FIDUCIAL-MICRO]  181.99,109.22 0 bottom
FD146  FIDUCIALUFIDUCIAL  [FIDUCIAL-MICRO]  181.99,109.22 0 top
FD147  FIDUCIALUFIDUCIAL  [FIDUCIAL-MICRO]  163.58,85.85 0 bottom
FD148  FIDUCIALUFIDUCIAL  [FIDUCIAL-MICRO]  163.58,85.85 0 top
FD149  FIDUCIALUFIDUCIAL  [FIDUCIAL-MICRO]  207.9,109.22 0 bottom
FD150  FIDUCIALUFIDUCIAL  [FIDUCIAL-MICRO]  207.9,109.22 0 top
FD151  FIDUCIALUFIDUCIAL  [FIDUCIAL-MICRO]  189.48,85.85 0 bottom
FD152  FIDUCIALUFIDUCIAL  [FIDUCIAL-MICRO]  189.48,85.85 0 top
FD153  FIDUCIALUFIDUCIAL  [FIDUCIAL-MICRO]  233.81,109.22 0 bottom
FD154  FIDUCIALUFIDUCIAL  [FIDUCIAL-MICRO]  233.81,109.22 0 top
FD155  FIDUCIALUFIDUCIAL  [FIDUCIAL-MICRO]  215.39,85.85 0 bottom
FD156  FIDUCIALUFIDUCIAL  [FIDUCIAL-MICRO]  215.39,85.85 0 top
FD157  FIDUCIALUFIDUCIAL  [FIDUCIAL-MICRO]  259.71,109.22 0 bottom
FD158  FIDUCIALUFIDUCIAL  [FIDUCIAL-MICRO]  259.71,109.22 0 top
FD159  FIDUCIALUFIDUCIAL  [FIDUCIAL-MICRO]  241.3,85.85 0 bottom
FD160  FIDUCIALUFIDUCIAL  [FIDUCIAL-MICRO]  241.3,85.85 0 top
FD161  FIDUCIALUFIDUCIAL  [FIDUCIAL-MICRO]  26.54,135.13 0 bottom
FD162  FIDUCIALUFIDUCIAL  [FIDUCIAL-MICRO]  26.54,135.13 0 top
FD163  FIDUCIALUFIDUCIAL  [FIDUCIAL-MICRO]  8.13,111.76 0 bottom
FD164  FIDUCIALUFIDUCIAL  [FIDUCIAL-MICRO]  8.13,111.76 0 top
FD165  FIDUCIALUFIDUCIAL  [FIDUCIAL-MICRO]  52.45,135.13 0 bottom
FD166  FIDUCIALUFIDUCIAL  [FIDUCIAL-MICRO]  52.45,135.13 0 top
FD167  FIDUCIALUFIDUCIAL  [FIDUCIAL-MICRO]  34.04,111.76 0 bottom
FD168  FIDUCIALUFIDUCIAL  [FIDUCIAL-MICRO]  34.04,111.76 0 top
FD169  FIDUCIALUFIDUCIAL  [FIDUCIAL-MICRO]  78.36,135.13 0 bottom
FD170  FIDUCIALUFIDUCIAL  [FIDUCIAL-MICRO]  78.36,135.13 0 top
FD171  FIDUCIALUFIDUCIAL  [FIDUCIAL-MICRO]  59.94,111.76 0 bottom
FD172  FIDUCIALUFIDUCIAL  [FIDUCIAL-MICRO]  59.94,111.76 0 top
FD173  FIDUCIALUFIDUCIAL  [FIDUCIAL-MICRO]  104.27,135.13 0 bottom
FD174  FIDUCIALUFIDUCIAL  [FIDUCIAL-MICRO]  104.27,135.13 0 top
FD175  FIDUCIALUFIDUCIAL  [FIDUCIAL-MICRO]  85.85,111.76 0 bottom
FD176  FIDUCIALUFIDUCIAL  [FIDUCIAL-MICRO]  85.85,111.76 0 top
FD177  FIDUCIALUFIDUCIAL  [FIDUCIAL-MICRO]  130.18,135.13 0 bottom
FD178  FIDUCIALUFIDUCIAL  [FIDUCIAL-MICRO]  130.18,135.13 0 top
FD179  FIDUCIALUFIDUCIAL  [FIDUCIAL-MICRO]  111.76,111.76 0 bottom
FD180  FIDUCIALUFIDUCIAL  [FIDUCIAL-MICRO]  111.76,111.76 0 top
FD181  FIDUCIALUFIDUCIAL  [FIDUCIAL-MICRO]  156.08,135.13 0 bottom
FD182  FIDUCIALUFIDUCIAL  [FIDUCIAL-MICRO]  156.08,135.13 0 top
FD183  FIDUCIALUFIDUCIAL  [FIDUCIAL-MICRO]  137.67,111.76 0 bottom
FD184  FIDUCIALUFIDUCIAL  [FIDUCIAL-MICRO]  137.67,111.76 0 top
FD185  FIDUCIALUFIDUCIAL  [FIDUCIAL-MICRO]  181.99,135.13 0 bottom
FD186  FIDUCIALUFIDUCIAL  [FIDUCIAL-MICRO]  181.99,135.13 0 top
FD187  FIDUCIALUFIDUCIAL  [FIDUCIAL-MICRO]  163.58,111.76 0 bottom
FD188  FIDUCIALUFIDUCIAL  [FIDUCIAL-MICRO]  163.58,111.76 0 top
FD189  FIDUCIALUFIDUCIAL  [FIDUCIAL-MICRO]  207.9,135.13 0 bottom
FD190  FIDUCIALUFIDUCIAL  [FIDUCIAL-MICRO]  207.9,135.13 0 top
FD191  FIDUCIALUFIDUCIAL  [FIDUCIAL-MICRO]  189.48,111.76 0 bottom
FD192  FIDUCIALUFIDUCIAL  [FIDUCIAL-MICRO]  189.48,111.76 0 top
FD193  FIDUCIALUFIDUCIAL  [FIDUCIAL-MICRO]  233.81,135.13 0 bottom
FD194  FIDUCIALUFIDUCIAL  [FIDUCIAL-MICRO]  233.81,135.13 0 top
FD195  FIDUCIALUFIDUCIAL  [FIDUCIAL-MICRO]  215.39,111.76 0 bottom
FD196  FIDUCIALUFIDUCIAL  [FIDUCIAL-MICRO]  215.39,111.76 0 top
FD197  FIDUCIALUFIDUCIAL  [FIDUCIAL-MICRO]  259.71,135.13 0 bottom
FD198  FIDUCIALUFIDUCIAL  [FIDUCIAL-MICRO]  259.71,135.13 0 top
FD199  FIDUCIALUFIDUCIAL  [FIDUCIAL-MICRO]  241.3,111.76 0 bottom
FD200  FIDUCIALUFIDUCIAL  [FIDUCIAL-MICRO]  241.3,111.76 0 top
J1  SMD  [1X04_1MM_RA]  11.94,19.56 270 top
J2  SMD  [1X04_1MM_RA]  27.18,19.56 90 top
J3  PTH  [1X04_NO_SILK]  11.94,8.13 0 top
J4  [1X03_NO_SILK]  27.18,8.13 180 top
J5  SMD  [1X04_1MM_RA]  37.85,19.56 270 top
J6  SMD  [1X04_1MM_RA]  53.09,19.56 90 top
J7  PTH  [1X04_NO_SILK]  37.85,8.13 0 top
J8  [1X03_NO_SILK]  53.09,8.13 180 top
J9  SMD  [1X04_1MM_RA]  63.75,19.56 270 top
J10  SMD  [1X04_1MM_RA]  78.99,19.56 90 top
J11  PTH  [1X04_NO_SILK]  63.75,8.13 0 top
J12  [1X03_NO_SILK]  78.99,8.13 180 top
J13  SMD  [1X04_1MM_RA]  89.66,19.56 270 top
J14  SMD  [1X04_1MM_RA]  104.9,19.56 90 top
J15  PTH  [1X04_NO_SILK]  89.66,8.13 0 top
J16  [1X03_NO_SILK]  104.9,8.13 180 top
J17  SMD  [1X04_1MM_RA]  115.57,19.56 270 top
J18  SMD  [1X04_1MM_RA]  130.81,19.56 90 top
J19  PTH  [1X04_NO_SILK]  115.57,8.13 0 top
J20  [1X03_NO_SILK]  130.81,8.13 180 top
J21  SMD  [1X04_1MM_RA]  141.48,19.56 270 top
J22  SMD  [1X04_1MM_RA]  156.72,19.56 90 top
J23  PTH  [1X04_NO_SILK]  141.48,8.13 0 top
J24  [1X03_NO_SILK]  156.72,8.13 180 top
J25  SMD  [1X04_1MM_RA]  167.39,19.56 270 top
J26  SMD  [1X04_1MM_RA]  182.63,19.56 90 top
J27  PTH  [1X04_NO_SILK]  167.39,8.13 0 top
J28  [1X03_NO_SILK]  182.63,8.13 180 top
J29  SMD  [1X04_1MM_RA]  193.29,19.56 270 top
J30  SMD  [1X04_1MM_RA]  208.53,19.56 90 top
J31  PTH  [1X04_NO_SILK]  193.29,8.13 0 top
J32  [1X03_NO_SILK]  208.53,8.13 180 top
J33  SMD  [1X04_1MM_RA]  219.2,19.56 270 top
J34  SMD  [1X04_1MM_RA]  234.44,19.56 90 top
J35  PTH  [1X04_NO_SILK]  219.2,8.13 0 top
J36  [1X03_NO_SILK]  234.44,8.13 180 top
J37  SMD  [1X04_1MM_RA]  245.11,19.56 270 top
J38  SMD  [1X04_1MM_RA]  260.35,19.56 90 top
J39  PTH  [1X04_NO_SILK]  245.11,8.13 0 top
J40  [1X03_NO_SILK]  260.35,8.13 180 top
J41  SMD  [1X04_1MM_RA]  11.94,45.47 270 top
J42  SMD  [1X04_1MM_RA]  27.18,45.47 90 top
J43  PTH  [1X04_NO_SILK]  11.94,34.04 0 top
J44  [1X03_NO_SILK]  27.18,34.04 180 top
J45  SMD  [1X04_1MM_RA]  37.85,45.47 270 top
J46  SMD  [1X04_1MM_RA]  53.09,45.47 90 top
J47  PTH  [1X04_NO_SILK]  37.85,34.04 0 top
J48  [1X03_NO_SILK]  53.09,34.04 180 top
J49  SMD  [1X04_1MM_RA]  63.75,45.47 270 top
J50  SMD  [1X04_1MM_RA]  78.99,45.47 90 top
J51  PTH  [1X04_NO_SILK]  63.75,34.04 0 top
J52  [1X03_NO_SILK]  78.99,34.04 180 top
J53  SMD  [1X04_1MM_RA]  89.66,45.47 270 top
J54  SMD  [1X04_1MM_RA]  104.9,45.47 90 top
J55  PTH  [1X04_NO_SILK]  89.66,34.04 0 top
J56  [1X03_NO_SILK]  104.9,34.04 180 top
J57  SMD  [1X04_1MM_RA]  115.57,45.47 270 top
J58  SMD  [1X04_1MM_RA]  130.81,45.47 90 top
J59  PTH  [1X04_NO_SILK]  115.57,34.04 0 top
J60  [1X03_NO_SILK]  130.81,34.04 180 top
J61  SMD  [1X04_1MM_RA]  141.48,45.47 270 top
J62  SMD  [1X04_1MM_RA]  156.72,45.47 90 top
J63  PTH  [1X04_NO_SILK]  141.48,34.04 0 top
J64  [1X03_NO_SILK]  156.72,34.04 180 top
J65  SMD  [1X04_1MM_RA]  167.39,45.47 270 top
J66  SMD  [1X04_1MM_RA]  182.63,45.47 90 top
J67  PTH  [1X04_NO_SILK]  167.39,34.04 0 top
J68  [1X03_NO_SILK]  182.63,34.04 180 top
J69  SMD  [1X04_1MM_RA]  193.29,45.47 270 top
J70  SMD  [1X04_1MM_RA]  208.53,45.47 90 top
J71  PTH  [1X04_NO_SILK]  193.29,34.04 0 top
J72  [1X03_NO_SILK]  208.53,34.04 180 top
J73  SMD  [1X04_1MM_RA]  219.2,45.47 270 top
J74  SMD  [1X04_1MM_RA]  234.44,45.47 90 top
J75  PTH  [1X04_NO_SILK]  219.2,34.04 0 top
J76  [1X03_NO_SILK]  234.44,34.04 180 top
J77  SMD  [1X04_1MM_RA]  245.11,45.47 270 top
J78  SMD  [1X04_1MM_RA]  260.35,45.47 90 top
J79  PTH  [1X04_NO_SILK]  245.11,34.04 0 top
J80  [1X03_NO_SILK]  260.35,34.04 180 top
J81  SMD  [1X04_1MM_RA]  11.94,71.37 270 top
J82  SMD  [1X04_1MM_RA]  27.18,71.37 90 top
J83  PTH  [1X04_NO_SILK]  11.94,59.94 0 top
J84  [1X03_NO_SILK]  27.18,59.94 180 top
J85  SMD  [1X04_1MM_RA]  37.85,71.37 270 top
J86  SMD  [1X04_1MM_RA]  53.09,71.37 90 top
J87  PTH  [1X04_NO_SILK]  37.85,59.94 0 top
J88  [1X03_NO_SILK]  53.09,59.94 180 top
J89  SMD  [1X04_1MM_RA]  63.75,71.37 270 top
J90  SMD  [1X04_1MM_RA]  78.99,71.37 90 top
J91  PTH  [1X04_NO_SILK]  63.75,59.94 0 top
J92  [1X03_NO_SILK]  78.99,59.94 180 top
J93  SMD  [1X04_1MM_RA]  89.66,71.37 270 top
J94  SMD  [1X04_1MM_RA]  104.9,71.37 90 top
J95  PTH  [1X04_NO_SILK]  89.66,59.94 0 top
J96  [1X03_NO_SILK]  104.9,59.94 180 top
J97  SMD  [1X04_1MM_RA]  115.57,71.37 270 top
J98  SMD  [1X04_1MM_RA]  130.81,71.37 90 top
J99  PTH  [1X04_NO_SILK]  115.57,59.94 0 top
J100  [1X03_NO_SILK]  130.81,59.94 180 top
J101  SMD  [1X04_1MM_RA]  141.48,71.37 270 top
J102  SMD  [1X04_1MM_RA]  156.72,71.37 90 top
J103  PTH  [1X04_NO_SILK]  141.48,59.94 0 top
J104  [1X03_NO_SILK]  156.72,59.94 180 top
J105  SMD  [1X04_1MM_RA]  167.39,71.37 270 top
J106  SMD  [1X04_1MM_RA]  182.63,71.37 90 top
J107  PTH  [1X04_NO_SILK]  167.39,59.94 0 top
J108  [1X03_NO_SILK]  182.63,59.94 180 top
J109  SMD  [1X04_1MM_RA]  193.29,71.37 270 top
J110  SMD  [1X04_1MM_RA]  208.53,71.37 90 top
J111  PTH  [1X04_NO_SILK]  193.29,59.94 0 top
J112  [1X03_NO_SILK]  208.53,59.94 180 top
J113  SMD  [1X04_1MM_RA]  219.2,71.37 270 top
J114  SMD  [1X04_1MM_RA]  234.44,71.37 90 top
J115  PTH  [1X04_NO_SILK]  219.2,59.94 0 top
J116  [1X03_NO_SILK]  234.44,59.94 180 top
J117  SMD  [1X04_1MM_RA]  245.11,71.37 270 top
J118  SMD  [1X04_1MM_RA]  260.35,71.37 90 top
J119  PTH  [1X04_NO_SILK]  245.11,59.94 0 top
J120  [1X03_NO_SILK]  260.35,59.94 180 top
J121  SMD  [1X04_1MM_RA]  11.94,97.28 270 top
J122  SMD  [1X04_1MM_RA]  27.18,97.28 90 top
J123  PTH  [1X04_NO_SILK]  11.94,85.85 0 top
J124  [1X03_NO_SILK]  27.18,85.85 180 top
J125  SMD  [1X04_1MM_RA]  37.85,97.28 270 top
J126  SMD  [1X04_1MM_RA]  53.09,97.28 90 top
J127  PTH  [1X04_NO_SILK]  37.85,85.85 0 top
J128  [1X03_NO_SILK]  53.09,85.85 180 top
J129  SMD  [1X04_1MM_RA]  63.75,97.28 270 top
J130  SMD  [1X04_1MM_RA]  78.99,97.28 90 top
J131  PTH  [1X04_NO_SILK]  63.75,85.85 0 top
J132  [1X03_NO_SILK]  78.99,85.85 180 top
J133  SMD  [1X04_1MM_RA]  89.66,97.28 270 top
J134  SMD  [1X04_1MM_RA]  104.9,97.28 90 top
J135  PTH  [1X04_NO_SILK]  89.66,85.85 0 top
J136  [1X03_NO_SILK]  104.9,85.85 180 top
J137  SMD  [1X04_1MM_RA]  115.57,97.28 270 top
J138  SMD  [1X04_1MM_RA]  130.81,97.28 90 top
J139  PTH  [1X04_NO_SILK]  115.57,85.85 0 top
J140  [1X03_NO_SILK]  130.81,85.85 180 top
J141  SMD  [1X04_1MM_RA]  141.48,97.28 270 top
J142  SMD  [1X04_1MM_RA]  156.72,97.28 90 top
J143  PTH  [1X04_NO_SILK]  141.48,85.85 0 top
J144  [1X03_NO_SILK]  156.72,85.85 180 top
J145  SMD  [1X04_1MM_RA]  167.39,97.28 270 top
J146  SMD  [1X04_1MM_RA]  182.63,97.28 90 top
J147  PTH  [1X04_NO_SILK]  167.39,85.85 0 top
J148  [1X03_NO_SILK]  182.63,85.85 180 top
J149  SMD  [1X04_1MM_RA]  193.29,97.28 270 top
J150  SMD  [1X04_1MM_RA]  208.53,97.28 90 top
J151  PTH  [1X04_NO_SILK]  193.29,85.85 0 top
J152  [1X03_NO_SILK]  208.53,85.85 180 top
J153  SMD  [1X04_1MM_RA]  219.2,97.28 270 top
J154  SMD  [1X04_1MM_RA]  234.44,97.28 90 top
J155  PTH  [1X04_NO_SILK]  219.2,85.85 0 top
J156  [1X03_NO_SILK]  234.44,85.85 180 top
J157  SMD  [1X04_1MM_RA]  245.11,97.28 270 top
J158  SMD  [1X04_1MM_RA]  260.35,97.28 90 top
J159  PTH  [1X04_NO_SILK]  245.11,85.85 0 top
J160  [1X03_NO_SILK]  260.35,85.85 180 top
J161  SMD  [1X04_1MM_RA]  11.94,123.19 270 top
J162  SMD  [1X04_1MM_RA]  27.18,123.19 90 top
J163  PTH  [1X04_NO_SILK]  11.94,111.76 0 top
J164  [1X03_NO_SILK]  27.18,111.76 180 top
J165  SMD  [1X04_1MM_RA]  37.85,123.19 270 top
J166  SMD  [1X04_1MM_RA]  53.09,123.19 90 top
J167  PTH  [1X04_NO_SILK]  37.85,111.76 0 top
J168  [1X03_NO_SILK]  53.09,111.76 180 top
J169  SMD  [1X04_1MM_RA]  63.75,123.19 270 top
J170  SMD  [1X04_1MM_RA]  78.99,123.19 90 top
J171  PTH  [1X04_NO_SILK]  63.75,111.76 0 top
J172  [1X03_NO_SILK]  78.99,111.76 180 top
J173  SMD  [1X04_1MM_RA]  89.66,123.19 270 top
J174  SMD  [1X04_1MM_RA]  104.9,123.19 90 top
J175  PTH  [1X04_NO_SILK]  89.66,111.76 0 top
J176  [1X03_NO_SILK]  104.9,111.76 180 top
J177  SMD  [1X04_1MM_RA]  115.57,123.19 270 top
J178  SMD  [1X04_1MM_RA]  130.81,123.19 90 top
J179  PTH  [1X04_NO_SILK]  115.57,111.76 0 top
J180  [1X03_NO_SILK]  130.81,111.76 180 top
J181  SMD  [1X04_1MM_RA]  141.48,123.19 270 top
J182  SMD  [1X04_1MM_RA]  156.72,123.19 90 top
J183  PTH  [1X04_NO_SILK]  141.48,111.76 0 top
J184  [1X03_NO_SILK]  156.72,111.76 180 top
J185  SMD  [1X04_1MM_RA]  167.39,123.19 270 top
J186  SMD  [1X04_1MM_RA]  182.63,123.19 90 top
J187  PTH  [1X04_NO_SILK]  167.39,111.76 0 top
J188  [1X03_NO_SILK]  182.63,111.76 180 top
J189  SMD  [1X04_1MM_RA]  193.29,123.19 270 top
J190  SMD  [1X04_1MM_RA]  208.53,123.19 90 top
J191  PTH  [1X04_NO_SILK]  193.29,111.76 0 top
J192  [1X03_NO_SILK]  208.53,111.76 180 top
J193  SMD  [1X04_1MM_RA]  219.2,123.19 270 top
J194  SMD  [1X04_1MM_RA]  234.44,123.19 90 top
J195  PTH  [1X04_NO_SILK]  219.2,111.76 0 top
J196  [1X03_NO_SILK]  234.44,111.76 180 top
J197  SMD  [1X04_1MM_RA]  245.11,123.19 270 top
J198  SMD  [1X04_1MM_RA]  260.35,123.19 90 top
J199  PTH  [1X04_NO_SILK]  245.11,111.76 0 top
J200  [1X03_NO_SILK]  260.35,111.76 180 top
JP1  JUMPER-SMT_3_1-NC_TRACE_NO-SILK  [SMT-JUMPER_3_1-NC_TRACE_NO-SILK]  9.4,22.1 180 bottom
JP2  JUMPER-SMT_3_1-NC_TRACE_NO-SILK  [SMT-JUMPER_3_1-NC_TRACE_NO-SILK]  35.31,22.1 180 bottom
JP3  JUMPER-SMT_3_1-NC_TRACE_NO-SILK  [SMT-JUMPER_3_1-NC_TRACE_NO-SILK]  61.21,22.1 180 bottom
JP4  JUMPER-SMT_3_1-NC_TRACE_NO-SILK  [SMT-JUMPER_3_1-NC_TRACE_NO-SILK]  87.12,22.1 180 bottom
JP5  JUMPER-SMT_3_1-NC_TRACE_NO-SILK  [SMT-JUMPER_3_1-NC_TRACE_NO-SILK]  113.03,22.1 180 bottom
JP6  JUMPER-SMT_3_1-NC_TRACE_NO-SILK  [SMT-JUMPER_3_1-NC_TRACE_NO-SILK]  138.94,22.1 180 bottom
JP7  JUMPER-SMT_3_1-NC_TRACE_NO-SILK  [SMT-JUMPER_3_1-NC_TRACE_NO-SILK]  164.85,22.1 180 bottom
JP8  JUMPER-SMT_3_1-NC_TRACE_NO-SILK  [SMT-JUMPER_3_1-NC_TRACE_NO-SILK]  190.75,22.1 180 bottom
JP9  JUMPER-SMT_3_1-NC_TRACE_NO-SILK  [SMT-JUMPER_3_1-NC_TRACE_NO-SILK]  216.66,22.1 180 bottom
JP10  JUMPER-SMT_3_1-NC_TRACE_NO-SILK  [SMT-JUMPER_3_1-NC_TRACE_NO-SILK]  242.57,22.1 180 bottom
JP11  JUMPER-SMT_3_1-NC_TRACE_NO-SILK  [SMT-JUMPER_3_1-NC_TRACE_NO-SILK]  9.4,48.01 180 bottom
JP12  JUMPER-SMT_3_1-NC_TRACE_NO-SILK  [SMT-JUMPER_3_1-NC_TRACE_NO-SILK]  35.31,48.01 180 bottom
JP13  JUMPER-SMT_3_1-NC_TRACE_NO-SILK  [SMT-JUMPER_3_1-NC_TRACE_NO-SILK]  61.21,48.01 180 bottom
JP14  JUMPER-SMT_3_1-NC_TRACE_NO-SILK  [SMT-JUMPER_3_1-NC_TRACE_NO-SILK]  87.12,48.01 180 bottom
JP15  JUMPER-SMT_3_1-NC_TRACE_NO-SILK  [SMT-JUMPER_3_1-NC_TRACE_NO-SILK]  113.03,48.01 180 bottom
JP16  JUMPER-SMT_3_1-NC_TRACE_NO-SILK  [SMT-JUMPER_3_1-NC_TRACE_NO-SILK]  138.94,48.01 180 bottom
JP17  JUMPER-SMT_3_1-NC_TRACE_NO-SILK  [SMT-JUMPER_3_1-NC_TRACE_NO-SILK]  164.85,48.01 180 bottom
JP18  JUMPER-SMT_3_1-NC_TRACE_NO-SILK  [SMT-JUMPER_3_1-NC_TRACE_NO-SILK]  190.75,48.01 180 bottom
JP19  JUMPER-SMT_3_1-NC_TRACE_NO-SILK  [SMT-JUMPER_3_1-NC_TRACE_NO-SILK]  216.66,48.01 180 bottom
JP20  JUMPER-SMT_3_1-NC_TRACE_NO-SILK  [SMT-JUMPER_3_1-NC_TRACE_NO-SILK]  242.57,48.01 180 bottom
JP21  JUMPER-SMT_3_1-NC_TRACE_NO-SILK  [SMT-JUMPER_3_1-NC_TRACE_NO-SILK]  9.4,73.91 180 bottom
JP22  JUMPER-SMT_3_1-NC_TRACE_NO-SILK  [SMT-JUMPER_3_1-NC_TRACE_NO-SILK]  35.31,73.91 180 bottom
JP23  JUMPER-SMT_3_1-NC_TRACE_NO-SILK  [SMT-JUMPER_3_1-NC_TRACE_NO-SILK]  61.21,73.91 180 bottom
JP24  JUMPER-SMT_3_1-NC_TRACE_NO-SILK  [SMT-JUMPER_3_1-NC_TRACE_NO-SILK]  87.12,73.91 180 bottom
JP25  JUMPER-SMT_3_1-NC_TRACE_NO-SILK  [SMT-JUMPER_3_1-NC_TRACE_NO-SILK]  113.03,73.91 180 bottom
JP26  JUMPER-SMT_3_1-NC_TRACE_NO-SILK  [SMT-JUMPER_3_1-NC_TRACE_NO-SILK]  138.94,73.91 180 bottom
JP27  JUMPER-SMT_3_1-NC_TRACE_NO-SILK  [SMT-JUMPER_3_1-NC_TRACE_NO-SILK]  164.85,73.91 180 bottom
JP28  JUMPER-SMT_3_1-NC_TRACE_NO-SILK  [SMT-JUMPER_3_1-NC_TRACE_NO-SILK]  190.75,73.91 180 bottom
JP29  JUMPER-SMT_3_1-NC_TRACE_NO-SILK  [SMT-JUMPER_3_1-NC_TRACE_NO-SILK]  216.66,73.91 180 bottom
JP30  JUMPER-SMT_3_1-NC_TRACE_NO-SILK  [SMT-JUMPER_3_1-NC_TRACE_NO-SILK]  242.57,73.91 180 bottom
JP31  JUMPER-SMT_3_1-NC_TRACE_NO-SILK  [SMT-JUMPER_3_1-NC_TRACE_NO-SILK]  9.4,99.82 180 bottom
JP32  JUMPER-SMT_3_1-NC_TRACE_NO-SILK  [SMT-JUMPER_3_1-NC_TRACE_NO-SILK]  35.31,99.82 180 bottom
JP33  JUMPER-SMT_3_1-NC_TRACE_NO-SILK  [SMT-JUMPER_3_1-NC_TRACE_NO-SILK]  61.21,99.82 180 bottom
JP34  JUMPER-SMT_3_1-NC_TRACE_NO-SILK  [SMT-JUMPER_3_1-NC_TRACE_NO-SILK]  87.12,99.82 180 bottom
JP35  JUMPER-SMT_3_1-NC_TRACE_NO-SILK  [SMT-JUMPER_3_1-NC_TRACE_NO-SILK]  113.03,99.82 180 bottom
JP36  JUMPER-SMT_3_1-NC_TRACE_NO-SILK  [SMT-JUMPER_3_1-NC_TRACE_NO-SILK]  138.94,99.82 180 bottom
JP37  JUMPER-SMT_3_1-NC_TRACE_NO-SILK  [SMT-JUMPER_3_1-NC_TRACE_NO-SILK]  164.85,99.82 180 bottom
JP38  JUMPER-SMT_3_1-NC_TRACE_NO-SILK  [SMT-JUMPER_3_1-NC_TRACE_NO-SILK]  190.75,99.82 180 bottom
JP39  JUMPER-SMT_3_1-NC_TRACE_NO-SILK  [SMT-JUMPER_3_1-NC_TRACE_NO-SILK]  216.66,99.82 180 bottom
JP40  JUMPER-SMT_3_1-NC_TRACE_NO-SILK  [SMT-JUMPER_3_1-NC_TRACE_NO-SILK]  242.57,99.82 180 bottom
JP41  JUMPER-SMT_3_1-NC_TRACE_NO-SILK  [SMT-JUMPER_3_1-NC_TRACE_NO-SILK]  9.4,125.73 180 bottom
JP42  JUMPER-SMT_3_1-NC_TRACE_NO-SILK  [SMT-JUMPER_3_1-NC_TRACE_NO-SILK]  35.31,125.73 180 bottom
JP43  JUMPER-SMT_3_1-NC_TRACE_NO-SILK  [SMT-JUMPER_3_1-NC_TRACE_NO-SILK]  61.21,125.73 180 bottom
JP44  JUMPER-SMT_3_1-NC_TRACE_NO-SILK  [SMT-JUMPER_3_1-NC_TRACE_NO-SILK]  87.12,125.73 180 bottom
JP45  JUMPER-SMT_3_1-NC_TRACE_NO-SILK  [SMT-JUMPER_3_1-NC_TRACE_NO-SILK]  113.03,125.73 180 bottom
JP46  JUMPER-SMT_3_1-NC_TRACE_NO-SILK  [SMT-JUMPER_3_1-NC_TRACE_NO-SILK]  138.94,125.73 180 bottom
JP47  JUMPER-SMT_3_1-NC_TRACE_NO-SILK  [SMT-JUMPER_3_1-NC_TRACE_NO-SILK]  164.85,125.73 180 bottom
JP48  JUMPER-SMT_3_1-NC_TRACE_NO-SILK  [SMT-JUMPER_3_1-NC_TRACE_NO-SILK]  190.75,125.73 180 bottom
JP49  JUMPER-SMT_3_1-NC_TRACE_NO-SILK  [SMT-JUMPER_3_1-NC_TRACE_NO-SILK]  216.66,125.73 180 bottom
JP50  JUMPER-SMT_3_1-NC_TRACE_NO-SILK  [SMT-JUMPER_3_1-NC_TRACE_NO-SILK]  242.57,125.73 180 bottom
LOGO1  OSHW-LOGOS  [OSHW-LOGO-S]  9.4,11.05 0 bottom
LOGO2  SFE_LOGO_NAME_FLAME.1_INCH  [SFE_LOGO_NAME_FLAME_.1]  13.72,26.67 0 top
LOGO3  SFE_LOGO_NAME_FLAME.1_INCH  [SFE_LOGO_NAME_FLAME_.1]  25.53,13.59 0 bottom
LOGO4  OSHW-LOGOS  [OSHW-LOGO-S]  35.31,11.05 0 bottom
LOGO5  SFE_LOGO_NAME_FLAME.1_INCH  [SFE_LOGO_NAME_FLAME_.1]  39.62,26.67 0 top
LOGO6  SFE_LOGO_NAME_FLAME.1_INCH  [SFE_LOGO_NAME_FLAME_.1]  51.44,13.59 0 bottom
LOGO7  OSHW-LOGOS  [OSHW-LOGO-S]  61.21,11.05 0 bottom
LOGO8  SFE_LOGO_NAME_FLAME.1_INCH  [SFE_LOGO_NAME_FLAME_.1]  65.53,26.67 0 top
LOGO9  SFE_LOGO_NAME_FLAME.1_INCH  [SFE_LOGO_NAME_FLAME_.1]  77.34,13.59 0 bottom
LOGO10  OSHW-LOGOS  [OSHW-LOGO-S]  87.12,11.05 0 bottom
LOGO11  SFE_LOGO_NAME_FLAME.1_INCH  [SFE_LOGO_NAME_FLAME_.1]  91.44,26.67 0 top
LOGO12  SFE_LOGO_NAME_FLAME.1_INCH  [SFE_LOGO_NAME_FLAME_.1]  103.25,13.59 0 bottom
LOGO13  OSHW-LOGOS  [OSHW-LOGO-S]  113.03,11.05 0 bottom
LOGO14  SFE_LOGO_NAME_FLAME.1_INCH  [SFE_LOGO_NAME_FLAME_.1]  117.35,26.67 0 top
LOGO15  SFE_LOGO_NAME_FLAME.1_INCH  [SFE_LOGO_NAME_FLAME_.1]  129.16,13.59 0 bottom
LOGO16  OSHW-LOGOS  [OSHW-LOGO-S]  138.94,11.05 0 bottom
LOGO17  SFE_LOGO_NAME_FLAME.1_INCH  [SFE_LOGO_NAME_FLAME_.1]  143.26,26.67 0 top
LOGO18  SFE_LOGO_NAME_FLAME.1_INCH  [SFE_LOGO_NAME_FLAME_.1]  155.07,13.59 0 bottom
LOGO19  OSHW-LOGOS  [OSHW-LOGO-S]  164.85,11.05 0 bottom
LOGO20  SFE_LOGO_NAME_FLAME.1_INCH  [SFE_LOGO_NAME_FLAME_.1]  169.16,26.67 0 top
LOGO21  SFE_LOGO_NAME_FLAME.1_INCH  [SFE_LOGO_NAME_FLAME_.1]  180.97,13.59 0 bottom
LOGO22  OSHW-LOGOS  [OSHW-LOGO-S]  190.75,11.05 0 bottom
LOGO23  SFE_LOGO_NAME_FLAME.1_INCH  [SFE_LOGO_NAME_FLAME_.1]  195.07,26.67 0 top
LOGO24  SFE_LOGO_NAME_FLAME.1_INCH  [SFE_LOGO_NAME_FLAME_.1]  206.88,13.59 0 bottom
LOGO25  OSHW-LOGOS  [OSHW-LOGO-S]  216.66,11.05 0 bottom
LOGO26  SFE_LOGO_NAME_FLAME.1_INCH  [SFE_LOGO_NAME_FLAME_.1]  220.98,26.67 0 top
LOGO27  SFE_LOGO_NAME_FLAME.1_INCH  [SFE_LOGO_NAME_FLAME_.1]  232.79,13.59 0 bottom
LOGO28  OSHW-LOGOS  [OSHW-LOGO-S]  242.57,11.05 0 bottom
LOGO29  SFE_LOGO_NAME_FLAME.1_INCH  [SFE_LOGO_NAME_FLAME_.1]  246.89,26.67 0 top
LOGO30  SFE_LOGO_NAME_FLAME.1_INCH  [SFE_LOGO_NAME_FLAME_.1]  258.7,13.59 0 bottom
LOGO31  OSHW-LOGOS  [OSHW-LOGO-S]  9.4,36.96 0 bottom
LOGO32  SFE_LOGO_NAME_FLAME.1_INCH  [SFE_LOGO_NAME_FLAME_.1]  13.72,52.58 0 top
LOGO33  SFE_LOGO_NAME_FLAME.1_INCH  [SFE_LOGO_NAME_FLAME_.1]  25.53,39.5 0 bottom
LOGO34  OSHW-LOGOS  [OSHW-LOGO-S]  35.31,36.96 0 bottom
LOGO35  SFE_LOGO_NAME_FLAME.1_INCH  [SFE_LOGO_NAME_FLAME_.1]  39.62,52.58 0 top
LOGO36  SFE_LOGO_NAME_FLAME.1_INCH  [SFE_LOGO_NAME_FLAME_.1]  51.44,39.5 0 bottom
LOGO37  OSHW-LOGOS  [OSHW-LOGO-S]  61.21,36.96 0 bottom
LOGO38  SFE_LOGO_NAME_FLAME.1_INCH  [SFE_LOGO_NAME_FLAME_.1]  65.53,52.58 0 top
LOGO39  SFE_LOGO_NAME_FLAME.1_INCH  [SFE_LOGO_NAME_FLAME_.1]  77.34,39.5 0 bottom
LOGO40  OSHW-LOGOS  [OSHW-LOGO-S]  87.12,36.96 0 bottom
LOGO41  SFE_LOGO_NAME_FLAME.1_INCH  [SFE_LOGO_NAME_FLAME_.1]  91.44,52.58 0 top
LOGO42  SFE_LOGO_NAME_FLAME.1_INCH  [SFE_LOGO_NAME_FLAME_.1]  103.25,39.5 0 bottom
LOGO43  OSHW-LOGOS  [OSHW-LOGO-S]  113.03,36.96 0 bottom
LOGO44  SFE_LOGO_NAME_FLAME.1_INCH  [SFE_LOGO_NAME_FLAME_.1]  117.35,52.58 0 top
LOGO45  SFE_LOGO_NAME_FLAME.1_INCH  [SFE_LOGO_NAME_FLAME_.1]  129.16,39.5 0 bottom
LOGO46  OSHW-LOGOS  [OSHW-LOGO-S]  138.94,36.96 0 bottom
LOGO47  SFE_LOGO_NAME_FLAME.1_INCH  [SFE_LOGO_NAME_FLAME_.1]  143.26,52.58 0 top
LOGO48  SFE_LOGO_NAME_FLAME.1_INCH  [SFE_LOGO_NAME_FLAME_.1]  155.07,39.5 0 bottom
LOGO49  OSHW-LOGOS  [OSHW-LOGO-S]  164.85,36.96 0 bottom
LOGO50  SFE_LOGO_NAME_FLAME.1_INCH  [SFE_LOGO_NAME_FLAME_.1]  169.16,52.58 0 top
LOGO51  SFE_LOGO_NAME_FLAME.1_INCH  [SFE_LOGO_NAME_FLAME_.1]  180.97,39.5 0 bottom
LOGO52  OSHW-LOGOS  [OSHW-LOGO-S]  190.75,36.96 0 bottom
LOGO53  SFE_LOGO_NAME_FLAME.1_INCH  [SFE_LOGO_NAME_FLAME_.1]  195.07,52.58 0 top
LOGO54  SFE_LOGO_NAME_FLAME.1_INCH  [SFE_LOGO_NAME_FLAME_.1]  206.88,39.5 0 bottom
LOGO55  OSHW-LOGOS  [OSHW-LOGO-S]  216.66,36.96 0 bottom
LOGO56  SFE_LOGO_NAME_FLAME.1_INCH  [SFE_LOGO_NAME_FLAME_.1]  220.98,52.58 0 top
LOGO57  SFE_LOGO_NAME_FLAME.1_INCH  [SFE_LOGO_NAME_FLAME_.1]  232.79,39.5 0 bottom
LOGO58  OSHW-LOGOS  [OSHW-LOGO-S]  242.57,36.96 0 bottom
LOGO59  SFE_LOGO_NAME_FLAME.1_INCH  [SFE_LOGO_NAME_FLAME_.1]  246.89,52.58 0 top
LOGO60  SFE_LOGO_NAME_FLAME.1_INCH  [SFE_LOGO_NAME_FLAME_.1]  258.7,39.5 0 bottom
LOGO61  OSHW-LOGOS  [OSHW-LOGO-S]  9.4,62.87 0 bottom
LOGO62  SFE_LOGO_NAME_FLAME.1_INCH  [SFE_LOGO_NAME_FLAME_.1]  13.72,78.49 0 top
LOGO63  SFE_LOGO_NAME_FLAME.1_INCH  [SFE_LOGO_NAME_FLAME_.1]  25.53,65.41 0 bottom
LOGO64  OSHW-LOGOS  [OSHW-LOGO-S]  35.31,62.87 0 bottom
LOGO65  SFE_LOGO_NAME_FLAME.1_INCH  [SFE_LOGO_NAME_FLAME_.1]  39.62,78.49 0 top
LOGO66  SFE_LOGO_NAME_FLAME.1_INCH  [SFE_LOGO_NAME_FLAME_.1]  51.44,65.41 0 bottom
LOGO67  OSHW-LOGOS  [OSHW-LOGO-S]  61.21,62.87 0 bottom
LOGO68  SFE_LOGO_NAME_FLAME.1_INCH  [SFE_LOGO_NAME_FLAME_.1]  65.53,78.49 0 top
LOGO69  SFE_LOGO_NAME_FLAME.1_INCH  [SFE_LOGO_NAME_FLAME_.1]  77.34,65.41 0 bottom
LOGO70  OSHW-LOGOS  [OSHW-LOGO-S]  87.12,62.87 0 bottom
LOGO71  SFE_LOGO_NAME_FLAME.1_INCH  [SFE_LOGO_NAME_FLAME_.1]  91.44,78.49 0 top
LOGO72  SFE_LOGO_NAME_FLAME.1_INCH  [SFE_LOGO_NAME_FLAME_.1]  103.25,65.41 0 bottom
LOGO73  OSHW-LOGOS  [OSHW-LOGO-S]  113.03,62.87 0 bottom
LOGO74  SFE_LOGO_NAME_FLAME.1_INCH  [SFE_LOGO_NAME_FLAME_.1]  117.35,78.49 0 top
LOGO75  SFE_LOGO_NAME_FLAME.1_INCH  [SFE_LOGO_NAME_FLAME_.1]  129.16,65.41 0 bottom
LOGO76  OSHW-LOGOS  [OSHW-LOGO-S]  138.94,62.87 0 bottom
LOGO77  SFE_LOGO_NAME_FLAME.1_INCH  [SFE_LOGO_NAME_FLAME_.1]  143.26,78.49 0 top
LOGO78  SFE_LOGO_NAME_FLAME.1_INCH  [SFE_LOGO_NAME_FLAME_.1]  155.07,65.41 0 bottom
LOGO79  OSHW-LOGOS  [OSHW-LOGO-S]  164.85,62.87 0 bottom
LOGO80  SFE_LOGO_NAME_FLAME.1_INCH  [SFE_LOGO_NAME_FLAME_.1]  169.16,78.49 0 top
LOGO81  SFE_LOGO_NAME_FLAME.1_INCH  [SFE_LOGO_NAME_FLAME_.1]  180.97,65.41 0 bottom
LOGO82  OSHW-LOGOS  [OSHW-LOGO-S]  190.75,62.87 0 bottom
LOGO83  SFE_LOGO_NAME_FLAME.1_INCH  [SFE_LOGO_NAME_FLAME_.1]  195.07,78.49 0 top
LOGO84  SFE_LOGO_NAME_FLAME.1_INCH  [SFE_LOGO_NAME_FLAME_.1]  206.88,65.41 0 bottom
LOGO85  OSHW-LOGOS  [OSHW-LOGO-S]  216.66,62.87 0 bottom
LOGO86  SFE_LOGO_NAME_FLAME.1_INCH  [SFE_LOGO_NAME_FLAME_.1]  220.98,78.49 0 top
LOGO87  SFE_LOGO_NAME_FLAME.1_INCH  [SFE_LOGO_NAME_FLAME_.1]  232.79,65.41 0 bottom
LOGO88  OSHW-LOGOS  [OSHW-LOGO-S]  242.57,62.87 0 bottom
LOGO89  SFE_LOGO_NAME_FLAME.1_INCH  [SFE_LOGO_NAME_FLAME_.1]  246.89,78.49 0 top
LOGO90  SFE_LOGO_NAME_FLAME.1_INCH  [SFE_LOGO_NAME_FLAME_.1]  258.7,65.41 0 bottom
LOGO91  OSHW-LOGOS  [OSHW-LOGO-S]  9.4,88.77 0 bottom
LOGO92  SFE_LOGO_NAME_FLAME.1_INCH  [SFE_LOGO_NAME_FLAME_.1]  13.72,104.39 0 top
LOGO93  SFE_LOGO_NAME_FLAME.1_INCH  [SFE_LOGO_NAME_FLAME_.1]  25.53,91.31 0 bottom
LOGO94  OSHW-LOGOS  [OSHW-LOGO-S]  35.31,88.77 0 bottom
LOGO95  SFE_LOGO_NAME_FLAME.1_INCH  [SFE_LOGO_NAME_FLAME_.1]  39.62,104.39 0 top
LOGO96  SFE_LOGO_NAME_FLAME.1_INCH  [SFE_LOGO_NAME_FLAME_.1]  51.44,91.31 0 bottom
LOGO97  OSHW-LOGOS  [OSHW-LOGO-S]  61.21,88.77 0 bottom
LOGO98  SFE_LOGO_NAME_FLAME.1_INCH  [SFE_LOGO_NAME_FLAME_.1]  65.53,104.39 0 top
LOGO99  SFE_LOGO_NAME_FLAME.1_INCH  [SFE_LOGO_NAME_FLAME_.1]  77.34,91.31 0 bottom
LOGO100  OSHW-LOGOS  [OSHW-LOGO-S]  87.12,88.77 0 bottom
LOGO101  SFE_LOGO_NAME_FLAME.1_INCH  [SFE_LOGO_NAME_FLAME_.1]  91.44,104.39 0 top
LOGO102  SFE_LOGO_NAME_FLAME.1_INCH  [SFE_LOGO_NAME_FLAME_.1]  103.25,91.31 0 bottom
LOGO103  OSHW-LOGOS  [OSHW-LOGO-S]  113.03,88.77 0 bottom
LOGO104  SFE_LOGO_NAME_FLAME.1_INCH  [SFE_LOGO_NAME_FLAME_.1]  117.35,104.39 0 top
LOGO105  SFE_LOGO_NAME_FLAME.1_INCH  [SFE_LOGO_NAME_FLAME_.1]  129.16,91.31 0 bottom
LOGO106  OSHW-LOGOS  [OSHW-LOGO-S]  138.94,88.77 0 bottom
LOGO107  SFE_LOGO_NAME_FLAME.1_INCH  [SFE_LOGO_NAME_FLAME_.1]  143.26,104.39 0 top
LOGO108  SFE_LOGO_NAME_FLAME.1_INCH  [SFE_LOGO_NAME_FLAME_.1]  155.07,91.31 0 bottom
LOGO109  OSHW-LOGOS  [OSHW-LOGO-S]  164.85,88.77 0 bottom
LOGO110  SFE_LOGO_NAME_FLAME.1_INCH  [SFE_LOGO_NAME_FLAME_.1]  169.16,104.39 0 top
LOGO111  SFE_LOGO_NAME_FLAME.1_INCH  [SFE_LOGO_NAME_FLAME_.1]  180.97,91.31 0 bottom
LOGO112  OSHW-LOGOS  [OSHW-LOGO-S]  190.75,88.77 0 bottom
LOGO113  SFE_LOGO_NAME_FLAME.1_INCH  [SFE_LOGO_NAME_FLAME_.1]  195.07,104.39 0 top
LOGO114  SFE_LOGO_NAME_FLAME.1_INCH  [SFE_LOGO_NAME_FLAME_.1]  206.88,91.31 0 bottom
LOGO115  OSHW-LOGOS  [OSHW-LOGO-S]  216.66,88.77 0 bottom
LOGO116  SFE_LOGO_NAME_FLAME.1_INCH  [SFE_LOGO_NAME_FLAME_.1]  220.98,104.39 0 top
LOGO117  SFE_LOGO_NAME_FLAME.1_INCH  [SFE_LOGO_NAME_FLAME_.1]  232.79,91.31 0 bottom
LOGO118  OSHW-LOGOS  [OSHW-LOGO-S]  242.57,88.77 0 bottom
LOGO119  SFE_LOGO_NAME_FLAME.1_INCH  [SFE_LOGO_NAME_FLAME_.1]  246.89,104.39 0 top
LOGO120  SFE_LOGO_NAME_FLAME.1_INCH  [SFE_LOGO_NAME_FLAME_.1]  258.7,91.31 0 bottom
LOGO121  OSHW-LOGOS  [OSHW-LOGO-S]  9.4,114.68 0 bottom
LOGO122  SFE_LOGO_NAME_FLAME.1_INCH  [SFE_LOGO_NAME_FLAME_.1]  13.72,130.3 0 top
LOGO123  SFE_LOGO_NAME_FLAME.1_INCH  [SFE_LOGO_NAME_FLAME_.1]  25.53,117.22 0 bottom
LOGO124  OSHW-LOGOS  [OSHW-LOGO-S]  35.31,114.68 0 bottom
LOGO125  SFE_LOGO_NAME_FLAME.1_INCH  [SFE_LOGO_NAME_FLAME_.1]  39.62,130.3 0 top
LOGO126  SFE_LOGO_NAME_FLAME.1_INCH  [SFE_LOGO_NAME_FLAME_.1]  51.44,117.22 0 bottom
LOGO127  OSHW-LOGOS  [OSHW-LOGO-S]  61.21,114.68 0 bottom
LOGO128  SFE_LOGO_NAME_FLAME.1_INCH  [SFE_LOGO_NAME_FLAME_.1]  65.53,130.3 0 top
LOGO129  SFE_LOGO_NAME_FLAME.1_INCH  [SFE_LOGO_NAME_FLAME_.1]  77.34,117.22 0 bottom
LOGO130  OSHW-LOGOS  [OSHW-LOGO-S]  87.12,114.68 0 bottom
LOGO131  SFE_LOGO_NAME_FLAME.1_INCH  [SFE_LOGO_NAME_FLAME_.1]  91.44,130.3 0 top
LOGO132  SFE_LOGO_NAME_FLAME.1_INCH  [SFE_LOGO_NAME_FLAME_.1]  103.25,117.22 0 bottom
LOGO133  OSHW-LOGOS  [OSHW-LOGO-S]  113.03,114.68 0 bottom
LOGO134  SFE_LOGO_NAME_FLAME.1_INCH  [SFE_LOGO_NAME_FLAME_.1]  117.35,130.3 0 top
LOGO135  SFE_LOGO_NAME_FLAME.1_INCH  [SFE_LOGO_NAME_FLAME_.1]  129.16,117.22 0 bottom